# Altium PCB board_1.PcbDoc
Units mil, origin at the board's own origin, x right, y up, seen from the top; angles counter-clockwise.
Board outline 2834.65 x 1574.8 mil, 2 copper layers (Top Layer, Bottom Layer); 26 components, 34 nets, 138 pads, 50 vias.
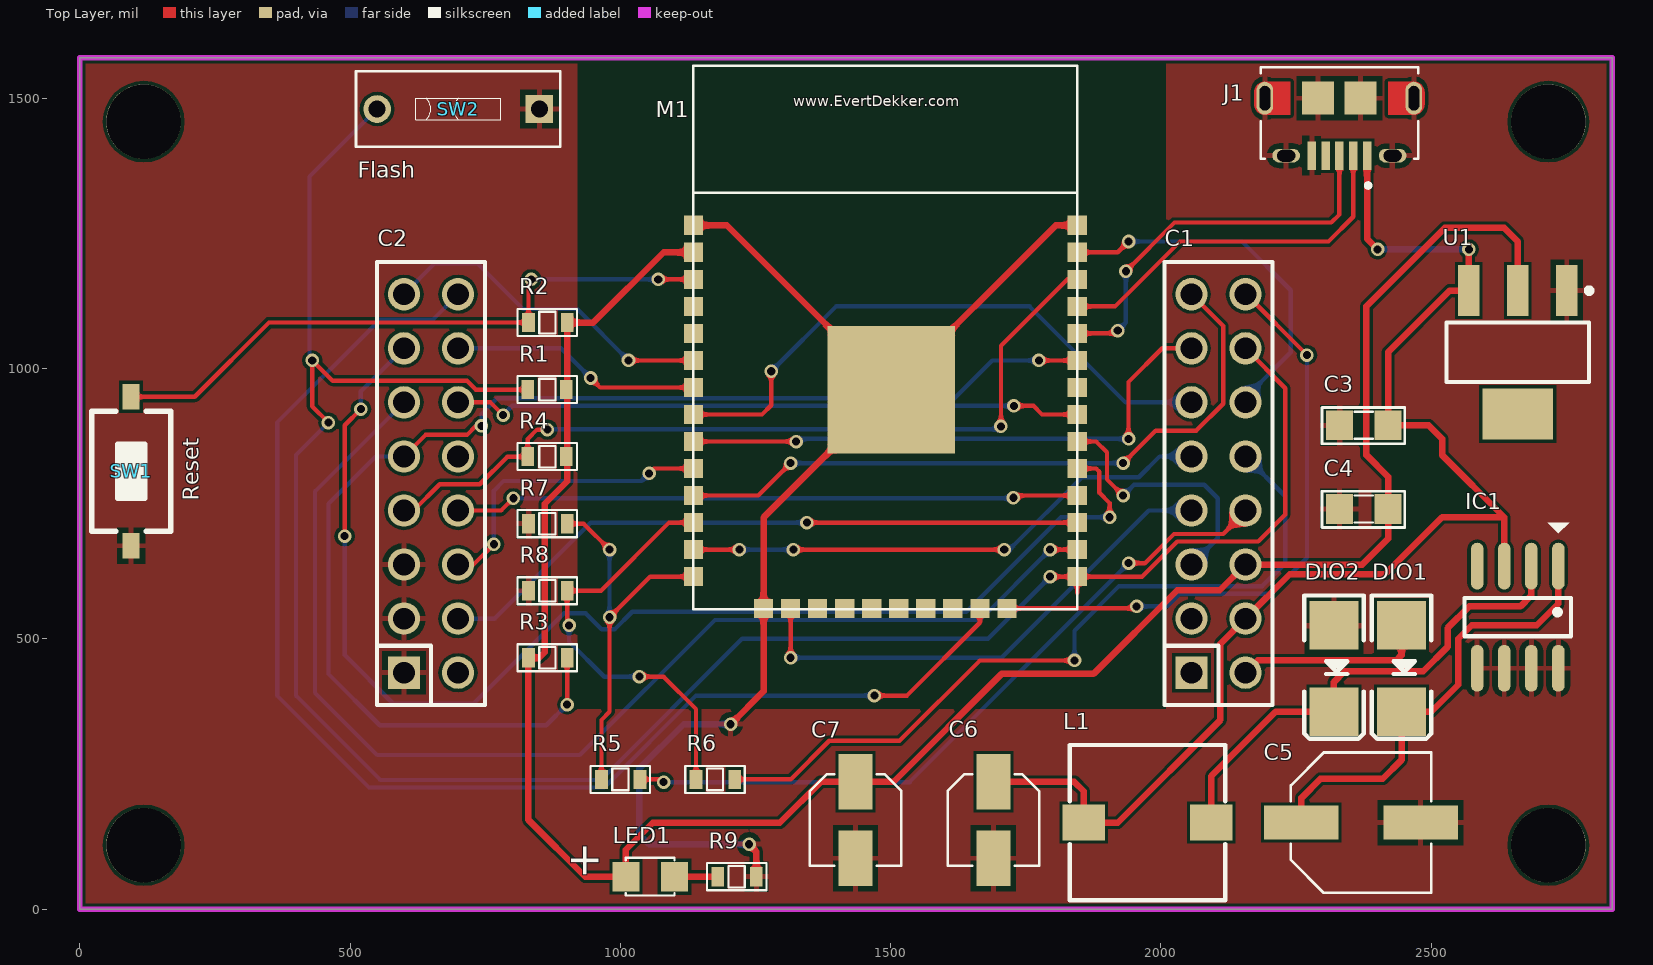
[diagram p0: Top Layer view]
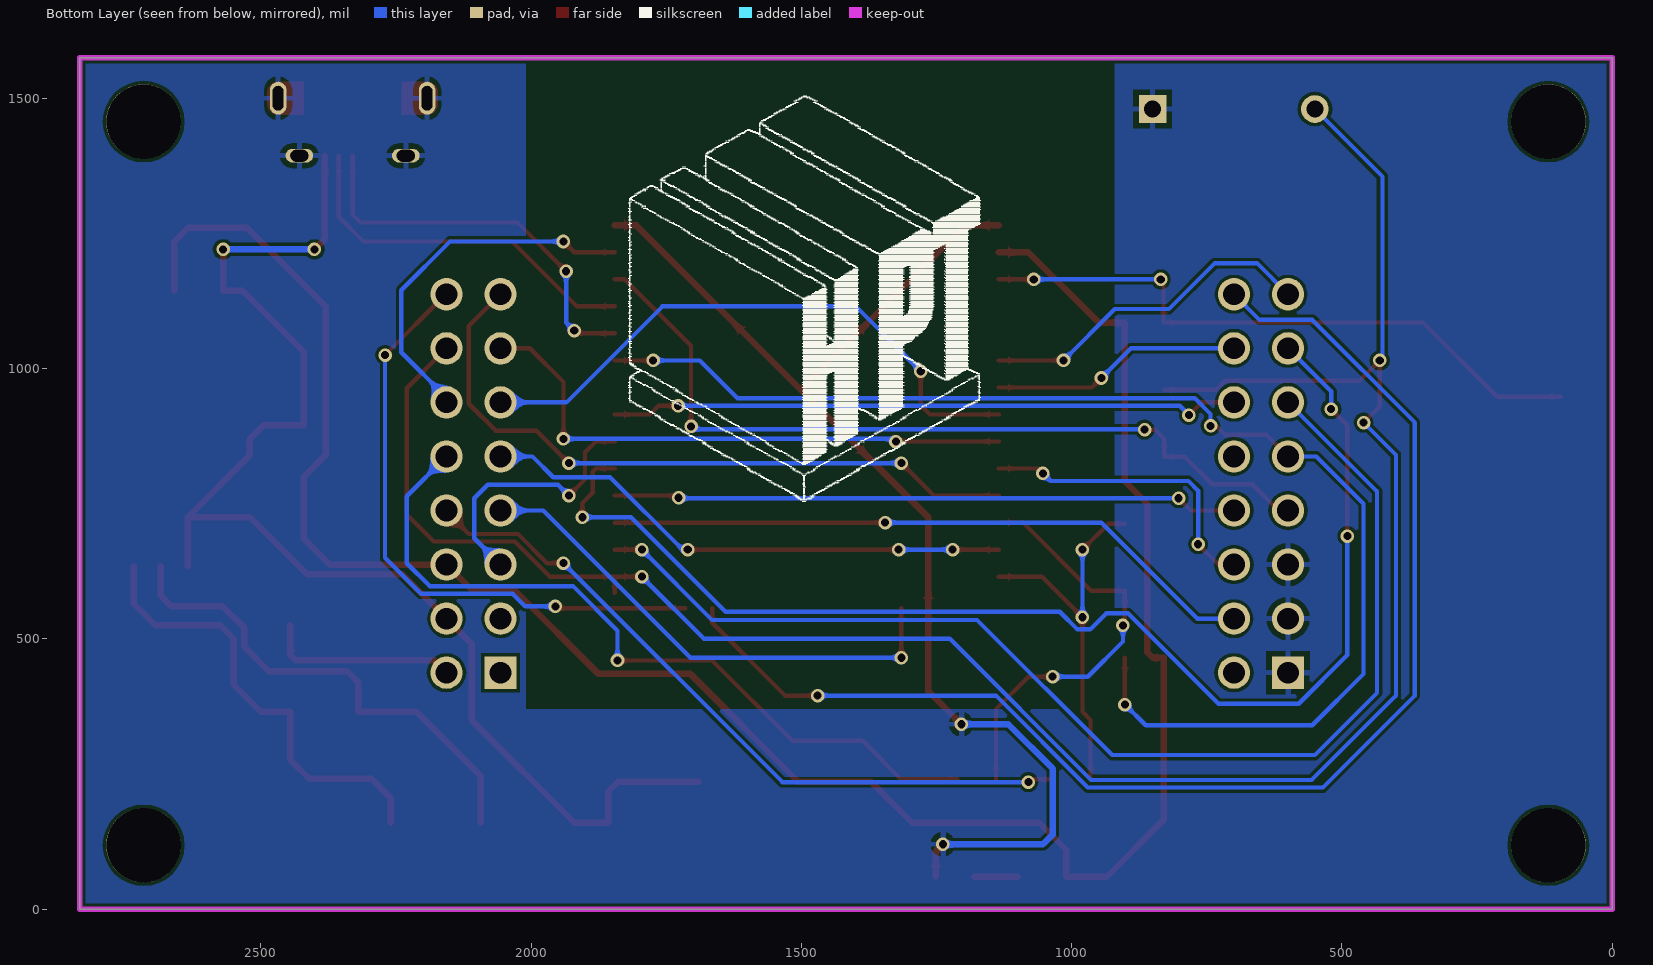
[diagram p1: Bottom Layer view, seen from below]
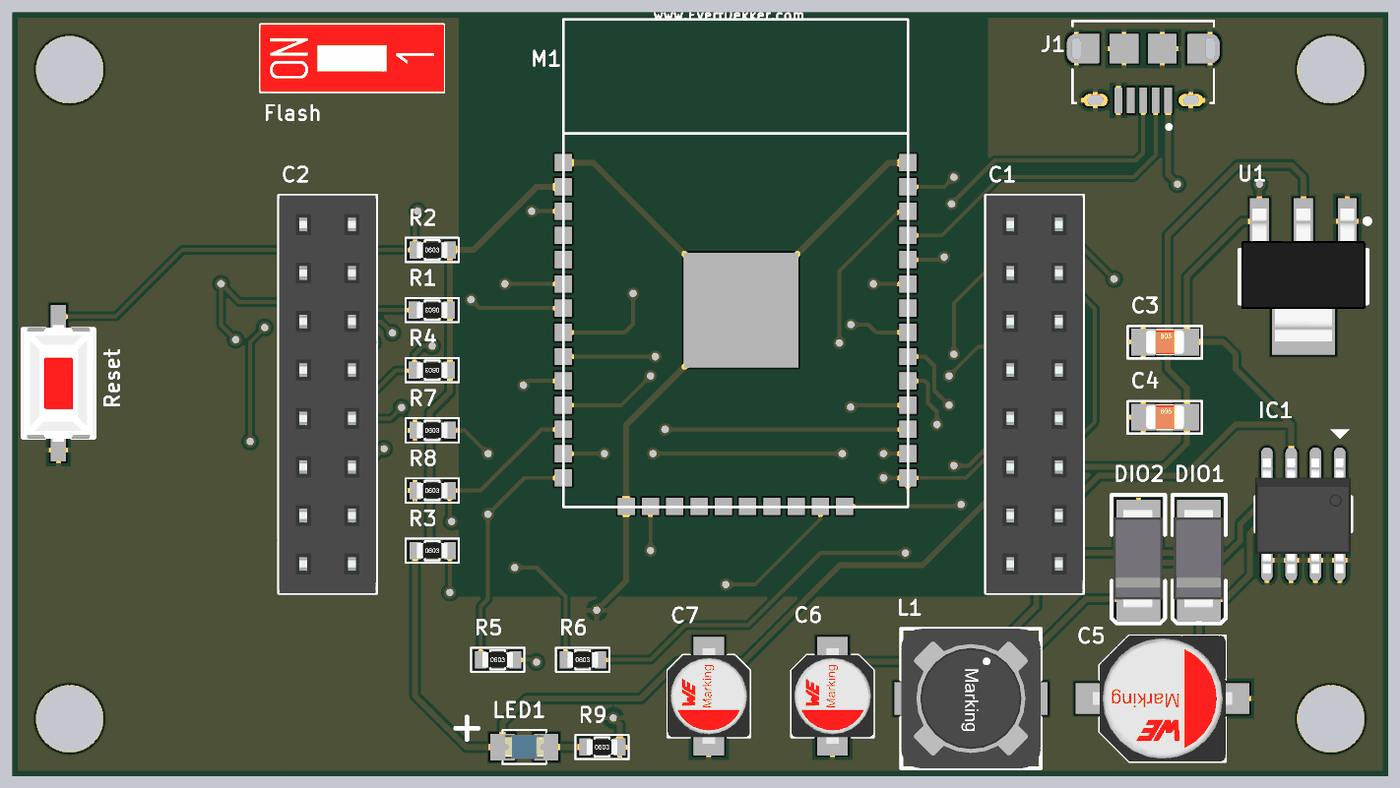
[diagram p2: 3D render of the assembled board from above, using the file's embedded part models]

## Layer stack, top to bottom
Top Solder: solder mask 0.4, Solder Resist, Dk 3.5
Top Layer: signal copper 1.4
Dielectric 1: dielectric 12.6, FR-4, Dk 4.8
Bottom Layer: signal copper 1.4
Bottom Solder: solder mask 0.4, Solder Resist, Dk 3.5

## Board outline
0,0 0,1574.8 2834.65,1574.8 2834.65,0

## Design rules (kind name [scope] priority, off if disabled: settings)
Clearance [All] p1: gap=6
PolygonConnect [All] p1: connectstyle=Relief reliefconductorwidth=10 reliefentries=4 polygonreliefangle="90 Angle" airgapwidth=10
RoomDefinition power [InComponentClass('power')] p1: confinementstyle=ConfineIn formatcopy=TRUE lockcomponents=FALSE outline 2960,1145 6265,1145 6265,1635 2960,1635
RoomDefinition esp32 [InComponentClass('esp32')] p2: confinementstyle=ConfineIn formatcopy=TRUE lockcomponents=FALSE outline 2960,-50 6465,-50 6465,1095 2960,1095
RoutingVias [All] p1: holewidth=15 width=25 viastyle="Through Hole" minholewidth=15 minwidth=25 maxholewidth=28 maxwidth=50
SolderMaskExpansion [All] p1: expansion=4
Width [All] p1: maxlimit=50 minlimit=8 preferedwidth=8
30 further rules are at their usual default settings.

## Classes and differential pairs
component class power: C3 C4 C5 C6 C7 DIO1 DIO2 IC1 L1 LED1 R9 U1
component class esp32: C1 C2 J1 M1 R1 R2 R3 R4 R5 R6 R7 R8 SW1 SW2

## Components (designator, comment, footprint, x,y, rotation, side; value= is the part's Value field where it differs from the comment)
C1 "JP8x2" JP8-C2T 2106.3,787.4 r90 top
C2 "JP8x2" JP8-C2T 649.61,787.4 r90 top
C3 "104" SM-CAP-0805 2330,895 r0 top
C4 "104" SM-CAP-0805 2330,740 r0 top
C5 "470uF" CAP-ALU-SMD-6.3x7.7x2.2 2370,160 r0 top
C6 "CN-ALU-SMD" CAP-ALU-SMD-4.5x5x1.4 1690,165 r270 top
C7 "CN-ALU-SMD" CAP-ALU-SMD-4.5x5x1.4 1435,165 r270 top
DIO1 "Diode SMD" DIO-SMD-106 2445,445 r90 top
DIO2 "Diode SMD" DIO-SMD-106 2320,445 r90 top
IC1 "xl1509-5V" SO-8 2660,540 r270 top
J1 "10118194-0001LF" AMPHENOL_10118194-0001LF 2330,1500 r180 top
L1 "1.0 μH" L-SMD-M-7.3x4.5 1975,160 r90 top
LED1 "LED" LED-0805-Blue 1010,60 r0 top
M1 "ESP32S_Module" ESP32S 1135,555 r0 top
R1 "10K" RES-SMD-0603 864.99,961 r180 top
R2 "10K" RES-SMD-0603 865,1085 r0 top
R3 "4K7" RES-SMD-0603 865,465 r0 top
R4 "4K7" RES-SMD-0603 864.99,837 r180 top
R5 "1K" RES-SMD-0603 1000,240 r0 top
R6 "1K" RES-SMD-0603 1175,240 r0 top
R7 "2K" RES-SMD-0603 865,713 r0 top
R8 "2K" RES-SMD-0603 865,589 r0 top
R9 "1K" RES-SMD-0603 1215,60 r0 top
SW1 "Reset" SW1-SMD 95,810 r270 top
SW2 "Flash" SW-DIP1-1 700,1480 r90 top
U1 "LM1117-3.3V" SOT223 2660,1030 r180 top

## Footprints (in the part's own frame and the unit in brackets; to place one, negate y for a bottom-side part, rotate by r counter-clockwise, add the part's x,y. Pads: shape width x height; smd on the part's side, far side on the other; paste and mask are expansions set on the pad)
AMPHENOL_10118194-0001LF [mm]
  rect 0.4x1.35 smd: 1(-1.3,2.7) 2(-0.65,2.7) 3(0,2.7) 4(0.65,2.7) 5(1.3,2.7)
  oval 1.3x0.65 hole 0.55 slot 0.85 at 0 deg: S1(-2.5,2.7) S2(2.5,2.7)
  oval 0.775x1.55 hole 0.5 slot 1.15 at 90 deg: S3(-3.5,0) S6(3.5,0)
  rect 1.5x1.55 smd: S4(-1,0) S5(1,0)
  Top Layer region: 193 vertices and 0 holes, not listed, extent 2.3,-0.78 4,0.775
  Top Layer region: 193 vertices and 0 holes, not listed, extent -4,-0.775 -2.3,0.78
  silkscreen extent -3.7,-1.45 3.7,4.2
CAP-ALU-SMD-4.5x5x1.4 [mm]
  rect 2.6x1.6 smd: 1(-1.8,0) 2(1.8,0)
  silkscreen extent -2.15,-2.15 2.15,2.15, body extent -2.5,-2.15 2.5,2.15, height 5.45
CAP-ALU-SMD-6.3x7.7x2.2 [mm]
  rect 3.5x1.6 smd: 1(-2.8,0) 2(2.8,0)
  silkscreen extent -3.3,-3.3 3.3,3.3, body extent -3.65,-3.3 3.65,3.3, height 7.65
DIO-SMD-106 [mil]
  rect 90x90.55 smd: 1(80,0) 2(-80,0)
  silkscreen extent -130,-55 135,55, body extent -99,-50 106,52, height 95
ESP32S [mm] "ESP32S-Module"
  rect 0.9x0.9 smd: 1(0,18.034) 2(0,16.764) 3(0,15.494) 4(0,14.224) 5(0,12.954) 6(0,11.684) 7(0,10.414) 8(0,9.144) 9(0,7.874) 10(0,6.604) 11(0,5.334) 12(0,4.064) 13(0,2.794) 14(0,1.524) 15(3.3,0.034) 16(4.57,0.034) 17(5.84,0.034) 18(7.11,0.034) 19(8.38,0.034) 20(9.65,0.034) 21(10.92,0.034) 22(12.19,0.034) 23(13.46,0.034) 24(14.73,0.034) 25(18.034,1.524) 26(18.034,2.794) 27(18.034,4.064) 28(18.034,5.334) 29(18.034,6.604) 30(18.034,7.874) 31(18.034,9.144) 32(18.034,10.414) 33(18.034,11.684) 34(18.034,12.954) 35(18.034,14.224) 36(18.034,15.494) 37(18.034,16.764) 38(18.034,18.034)
  rect 6x6 smd: 101(9.3,10.3)
  silkscreen extent 0,0 18.03,25.53, body extent 0,0 18.03,25.53, height 2
JP8-C2T [mm] "16 pins, dual row, straight, gold plating"
  rect 1.52x1.52 hole 1.02: 1(-8.89,1.27)
  round 1.52 hole 1.02: 2(-6.35,1.27) 3(-3.81,1.27) 4(-1.27,1.27) 5(1.27,1.27) 6(3.81,1.27) 7(6.35,1.27) 8(8.89,1.27) 9(8.89,-1.27) 10(6.35,-1.27) 11(3.81,-1.27) 12(1.27,-1.27) 13(-1.27,-1.27) 14(-3.81,-1.27) 15(-6.35,-1.27) 16(-8.89,-1.27)
  silkscreen extent -10.41,-2.54 10.41,2.54, body extent -10.41,-2.54 10.41,2.54, height 8.51
L-SMD-M-7.3x4.5 [mm] "WE-PDA SMD Shielded Power Inductor, 7345"
  rect 1.7x2 smd: 1(0,3) 2(0,-3)
  silkscreen extent -3.65,-3.65 3.65,3.65, body extent -3.65,-3.65 3.65,3.65, height 4.05
LED-0805-Blue [mil]
  rect 50x55 smd: 1(0,0) 2(90,0)
  silkscreen extent 0,-35 90,35, body extent 5,-25 85,25, height 43
RES-SMD-0603 [mm]
  rect 0.6x0.9 smd: 1(-0.889,0) 2(0.927,0)
  silkscreen extent -1.4,-0.64 1.4,0.64, body extent -0.8,-0.4 0.8,0.4, height 0.43
SM-CAP-0805 [mil]
  rect 50x55 smd: 1(0,0) 2(90,0)
  silkscreen extent -32,-34 121,33, body extent 6,-25 84,25, height 31
SO-8 [mm] "8-Pin Small Outline Integrated Circuit 1.27 mm Pitch, IPC Medium Density"
  oval 2.2x0.6 smd: 1(-2.4,1.905) 2(-2.4,0.635) 3(-2.4,-0.635) 4(-2.4,-1.905) 5(2.4,-1.905) 6(2.4,-0.635) 7(2.4,0.635) 8(2.4,1.905)
  silkscreen extent -4.45,-2.5 0.9,2.5, body extent -2.93,-2.51 3.08,2.49, height 1.75
SOT223 [mm]
  rect 1x2.4 smd: 1(-2.3,-2.9) 2(0,-2.9) 3(2.3,-2.9)
  rect 3.3x2.4 smd: 4(0,2.9)
  silkscreen extent -3.48,-3.02 3.35,1.4, body extent -3.25,-3.56 3.25,3.4, height 1.68
SW1-SMD [mm]
  rect 1.2x0.8 smd: 1(-3.5,0) 2(3.5,0)
  silkscreen extent -2.82,-1.85 2.82,1.85, body extent -3.05,-1.85 3.05,1.85, height 2.5
SW-DIP1-1 [mm] "01p, 2.54mm Pitch, Horizontal, Box Type, THT, flat Actuator, red, without Tape, Tube"
  rect 1.3x1.3 hole 0.8: 1(0,-3.81)
  round 1.3 hole 0.8: 2(0,3.81)
  silkscreen extent -1.77,-4.8 1.77,4.8, body extent -1.77,-4.8 1.77,4.8, height 5.4

## Part data
C1 C2: "WR-PHD 2.54 mm Dual Socket Header"
C3 C4: library part CN
C5: library part CN-ALU-SMD, "Polarized Capacitor (Axial)"
C6 C7: "Polarized Capacitor (Axial)"
DIO1 DIO2: "Default Diode"
IC1: library part LS1240A, "Electronic Two-Tone Ringer"
J1: "USB - micro B USB 2.0 Receptacle Connector 5 Position Surface Mount, Right Angle; Through Hole"
L1: library part L-SMD-1
LED1: library part "LED SMD"
M1: "Esp-32S"
R1 R2 R3 R4 R5 R6 R7 R8 R9: library part Res-SMD, "Resistor"
SW1 SW2: library part SW2, "Switch button 2 pin"
U1: library part LM1117, "800mA Low-Dropout Linear Regulator"

## Free pads (board coordinates)
  round 137.8 hole 137.8: 2(118.11,118.11) 2(118.11,1456.69) 2(2716.54,118.11) 2(2716.54,1456.69)

## Via types
v1: diameter 25, hole 15, Top Layer to Bottom Layer, tented both sides, 50 vias

## Nets (pads, with @x,y where several pads share a name; then routed paths per layer and width w, separated by ;. In a path a pad name is that pad's centre, name@x,y a point inside that pad or via, vN(x,y) a via of type N, cw(c..) or ccw(c..) an arc to the next point about the centre after c; other vN are vias at no path point)
3V3_1: C1.14 C4.2 C7.1 LED1.1 M1.2 R1.1 R2.2 R3.1 R4.1 U1.2 | length 4058.2
  Top Layer w12: M1.2 1080,1215 950,1085 R2.2 901.49,791.49 860,750 860,475 850,465 R3.1 830,165 935,60 LED1.1 1010,110 1060,160 1295,160 1370.87,235.87 C7.1 1505.87,235.87 1705,435 1875,435 2030,590 2108.9,590 C1.14 2372.4,637.4 2420,685 C4.2 2420,800 2380,840 2380,1115 2525,1260 2635,1260 2660,1235 U1.2
5V: C1.15 C3.2 C6.1 IC1.3 J1.1 L1.1 U1.3 | length 2478.8
  Top Layer w12: C6.1 1839.13,235.87 1856.89,218.11 L1.1 1920,160 2110,350 2110,491.1 C1.15 2238.3,619.4 2414.4,619.4 2520,725 2635,725 ; J1.1 2381.18,1239.92 v1(2400.55,1220.55) ; v1(2569.45,1220.55) U1.3 2534.17,1144.17 2420,1030 C3.2 2495,895 2520,870 2520,840 2635,725 ; IC1.3 2635,725
  Bottom Layer w12: v1(2400.55,1220.55) v1(2569.45,1220.55)
12V: C1.16 DIO1.1 | length 357.2
  Top Layer w12: C1.16 2178.9,460 2435,460 2445,470 DIO1.1
BTN_M1: C2.6 M1.26 | length 2220.6
  Top Layer w8: v1(1795,665) M1.26
  Bottom Layer w8: C2.6 435,772.8 435,400 550,285 925,285 1175,535 1665,535 v1(1795,665)
BTN_M2: C2.7 M1.29 | length 2368.2
  Top Layer w8: v1(490,690) 490,895 v1(520,925) ; M1.29 1880,815 1886,809 1886,770.2 1905,751.2 v1(1905,725)
  Bottom Layer w8: v1(490,690) 490,470 580,380 728.18,380 895.68,547.5 935.68,547.5 965.68,517.5 989.32,517.5 1021.82,550 1640,550 1815,725 v1(1905,725) ; v1(520,925) 520,957.8 C2.7
BTN_M3: C2.8 M1.6 | length 633.8
  Top Layer w8: v1(1015,1015) M1.6
  Bottom Layer w8: C2.8 657.2,1195 735,1195 820,1110 920,1110 v1(1015,1015)
BTN_M4: C2.9 M1.23 | length 2461
  Top Layer w8: v1(1470,395) 1530,395 1664.92,529.92 M1.23
  Bottom Layer w8: C2.9 652.2,1090 555,1090 365,900 365,395 535,225 970,225 1140,395 v1(1470,395)
BTN_M5: C2.10 M1.7 | length 465.4
  Top Layer w8: v1(945,982.49) 962.49,965 M1.7
  Bottom Layer w8: C2.10 890.09,1037.4 v1(945,982.49)
BTN_M6: C1.6 M1.8 | length 1114.6
  Top Layer w8: M1.8 1262,915 1279,932 v1(1279,995)
  Bottom Layer w8: v1(1279,995) 1399,1115 1757,1115 1934.6,937.4 C1.6
BTN_M7: C1.7 M1.9 | length 1054.2
  Top Layer w8: M1.9 v1(1325,865) ; v1(1940,870) 1940,975 2002.4,1037.4 C1.7
  Bottom Layer w8: v1(1325,865) 1330,870 v1(1940,870)
BTN_M8: C1.8 M1.11 | length 1277.1
  Top Layer w8: M1.11 1255,765 v1(1315,825) ; v1(1930,825) 1990,885 2065,885 2115,935 2115,1078.7 C1.8
  Bottom Layer w8: v1(1315,825) v1(1930,825)
BTN_M9: C1.10 M1.25 R1.2 SW2.2 | length 4062.6
  Top Layer w8: v1(460,900) 430,930 v1(430,1015) 467.68,977.32 716.14,977.32 732.47,961 R1.2 ; v1(1795,615) M1.25 ; 1845,585.34 M1.25 ; C1.10 2230,963.7 2230,730 2180,680 2030,680 1965,615 M1.25
  Bottom Layer w8: v1(430,1015) 425,1020 425,1355 SW2.2 ; v1(460,900) 400,840 400,395 556,239 964.2,239 1225.2,500 1680,500 v1(1795,615)
BTN_M10: C1.9 M1.24 | length 1129.1
  Top Layer w8: M1.24 1951.34,556.34 v1(1955,560) ; C1.9 2157.6,1137.4 v1(2270,1025)
  Bottom Layer w8: v1(1955,560) 2010.48,560 2033.96,583.48 2203.48,583.48 2270,650 v1(2270,1025)
DS: C2.11 M1.31 | length 1168.8
  Top Layer w8: C2.11 759.6,937.4 v1(783,914) ; v1(1728,931) 1764,931 1780,915 M1.31
  Bottom Layer w8: v1(783,914) 800,931 v1(1728,931)
DS_2: C2.15 M1.27 | length 1219
  Top Layer w8: v1(1345,715) M1.27
  Bottom Layer w8: C2.15 767.4,537.4 945,715 v1(1345,715)
GND: C2.1 C2.2 C2.3 C3.1 C4.1 C5.2 C6.2 C7.2 DIO2.1 IC1.5 IC1.6 IC1.7 IC1.8 J1.5 J1.S1 J1.S2 J1.S3 J1.S4 J1.S5 J1.S6 M1.1 M1.15 M1.38 M1.101 R7.1 R8.1 R9.2 SW1.2 SW2.1 U1.1 | length 2304.8
  Top Layer w12: M1.1 1196.65,1265 M1.101 ; v1(1204,342) 1264.92,402.92 M1.15 1264.92,724.29 M1.101 ; v1(1238,120) 1251.49,106.51 R9.2 ; M1.38 1805.63,1265 M1.101
  Bottom Layer w12: v1(1204,342) 1117,342 1035,260 1035,138 1053,120 v1(1238,120)
IN_LED_1: C1.13 R5.2 | length 1331.2
  Top Layer w8: R5.2 1075,240 v1(1080,235) ; v1(1940,640) 1970.2,640 2024.2,694 2115,694 2156.3,735.3 C1.13
  Bottom Layer w8: v1(1080,235) 1535,235 v1(1940,640)
IN_LED_1_1: M1.14 R5.1 R7.2 | length 715.7
  Top Layer w8: R7.2 932,713 v1(980,665) ; R5.1 965,350 980,365 v1(980,540) 1055,615 M1.14
  Bottom Layer w8: v1(980,540) v1(980,665)
IN_LED_2: C1.12 R6.2 | length 1444.3
  Top Layer w8: R6.2 1315,240 1386.31,311.31 1516.31,311.31 1665,460 v1(1840,460)
  Bottom Layer w8: v1(1840,460) 1840,515 1922.48,597.48 2187.48,597.48 2230,640 2230,763.7 C1.12
IN_LED_2_1: M1.12 R6.1 R8.2 | length 797.9
  Top Layer w8: v1(905,525) 901.49,528.51 R8.2 964,589 1090,715 M1.12 ; v1(1035,430) 1080,430 1140,370 R6.1
  Bottom Layer w8: v1(905,525) 905,495 970,430 v1(1035,430)
MODE_RUN: C2.14 M1.10 | length 567
  Top Layer w8: C2.14 728.4,637.4 v1(766,675) ; v1(1053,806) 1062,815 M1.10
  Bottom Layer w8: v1(766,675) 766,774 784,792 1039,792 v1(1053,806)
MODE_SETUP: C1.11 M1.37 | length 682.8
  Top Layer w8: M1.37 1920,1215 v1(1940,1235)
  Bottom Layer w8: v1(1940,1235) 2150,1235 2240,1145 2240,1030 2156.3,946.3 C1.11
NetC5_1: C5.1 DIO1.2 IC1.1 | length 841.2
  Top Layer w12: C5.1 2259.76,205.76 2295,241 2410,241 2445,276 DIO1.2 2500,365 2550,415 2550,500 2575,525 2695,525 2735,565 IC1.1
NetDIO2_2: DIO2.2 IC1.2 L1.2 | length 923.5
  Top Layer w12: L1.2 2093.11,246.11 2212,365 DIO2.2 2320,420 2340,440 2485,440 2530,485 2530,520 2570,560 2665,560 2685,580 IC1.2
NetLED1_2: LED1.2 R9.1 | length 80
  Top Layer w12: LED1.2 R9.1
NetM1_3: M1.3 R2.1 SW1.1 | length 1173.9
  Top Layer w8: SW1.1 212.8,947.8 350,1085 R2.1 830,1160 v1(835,1165) ; v1(1070,1165) M1.3
  Bottom Layer w8: v1(835,1165) v1(1070,1165)
RX_1: J1.2 M1.35 | length 692.3
  Top Layer w8: M1.35 1915,1115 2035,1235 2310,1235 2355.59,1280.59 J1.2
SCL: C2.4 M1.36 R4.2 | length 1529.4
  Top Layer w8: C2.4 617.4,737.4 666,786 740,786 791,837 R4.2 828.51,869.51 846,887 v1(865,887) ; v1(1704,893) 1704,1042 1827,1165 M1.36
  Bottom Layer w8: v1(865,887) 865.5,887.5 1699.5,887.5 1704,892 v1(1704,893)
SDA: C2.5 M1.33 R3.2 | length 2405.9
  Top Layer w8: C2.5 639.53,877.32 716.14,877.32 732.82,894 v1(743,894) ; v1(901.49,378.51) R3.2 ; v1(1774,1015) M1.33
  Bottom Layer w8: C2.5 547.4,837.4 460,750 460,435 555,340 862.98,340 v1(901.49,378.51) ; v1(743,894) 743,916 772,945 1618,945 1688,1015 v1(1774,1015)
SH_CP: C1.3 M1.30 | length 492.1
  Top Layer w8: M1.30 1880,865 1900,845 1900,795 v1(1930,765)
  Bottom Layer w8: v1(1930,765) 1950,785 2080,785 2105,760 2105,686.1 C1.3
SH_CP_2: C1.5 M1.13 | length 992.7
  Top Layer w8: M1.13 v1(1220,665) ; v1(1320,665) v1(1710,665)
  Bottom Layer w8: v1(1220,665) v1(1320,665) ; v1(1710,665) 1720,665 1854,799 1959,799 1997.4,837.4 C1.5
ST_CP: C2.13 M1.28 | length 1156.8
  Top Layer w8: C2.13 779.4,737.4 v1(802,760) ; v1(1727,761) 1731,765 M1.28
  Bottom Layer w8: v1(802,760) 1726,760 v1(1727,761)
ST_CP_2: C1.4 M1.16 | length 945.4
  Top Layer w8: v1(1314.92,465.08) M1.16
  Bottom Layer w8: v1(1314.92,465.08) 1705.08,465.08 1977.4,737.4 C1.4
TX_1: J1.3 M1.34 | length 740.5
  Top Layer w8: M1.34 1915,1065 v1(1920,1070) ; v1(1935,1180) 2025,1270 2315,1270 2330,1285 J1.3
  Bottom Layer w8: v1(1920,1070) 1935,1085 v1(1935,1180)
pads on no net: C1.1 C1.2 C2.12 C2.16 IC1.4 J1.4 M1.4 M1.5 M1.17 M1.18 M1.19 M1.20 M1.21 M1.22 M1.32 U1.4

## Polygon pours and split planes (outlines as drawn)
GND on Top Layer "Bottom Layer-No Net" (solid, remove dead copper, pour order 0): 0,0 0,1574.8 755,1574.8 920,1574.8 920,410 920,370 2010,370 2010,1574.8 2834.65,1574.8 2834.65,0
GND on Bottom Layer "Bottom Layer-No Net" (solid, remove dead copper, pour order 2): 0,0 0,1575 920,1575 920,370 2010,370 2010,1575 2835,1575 2835,0

## Keep-outs
Keep-Out Layer:
  the board outline again, w10

## Silkscreen, mask and mechanical layers (free items; w line width, h text height)
Top Overlay:
  text "+" at 960,55 h60 r90
Bottom Overlay:
  drawing of 2330 lines, arcs and shapes, not listed

## Text inside footprints (layer, text, board x,y; h text height)
J1: Mechanical 13 "PCB END" at 2406.77,1582.68 h19.68 r180
M1: Top Overlay "www.EvertDekker.com" at 1320,1485 h19.68